# EAGLE board Magic CAN Node (EAGLE 5.12)
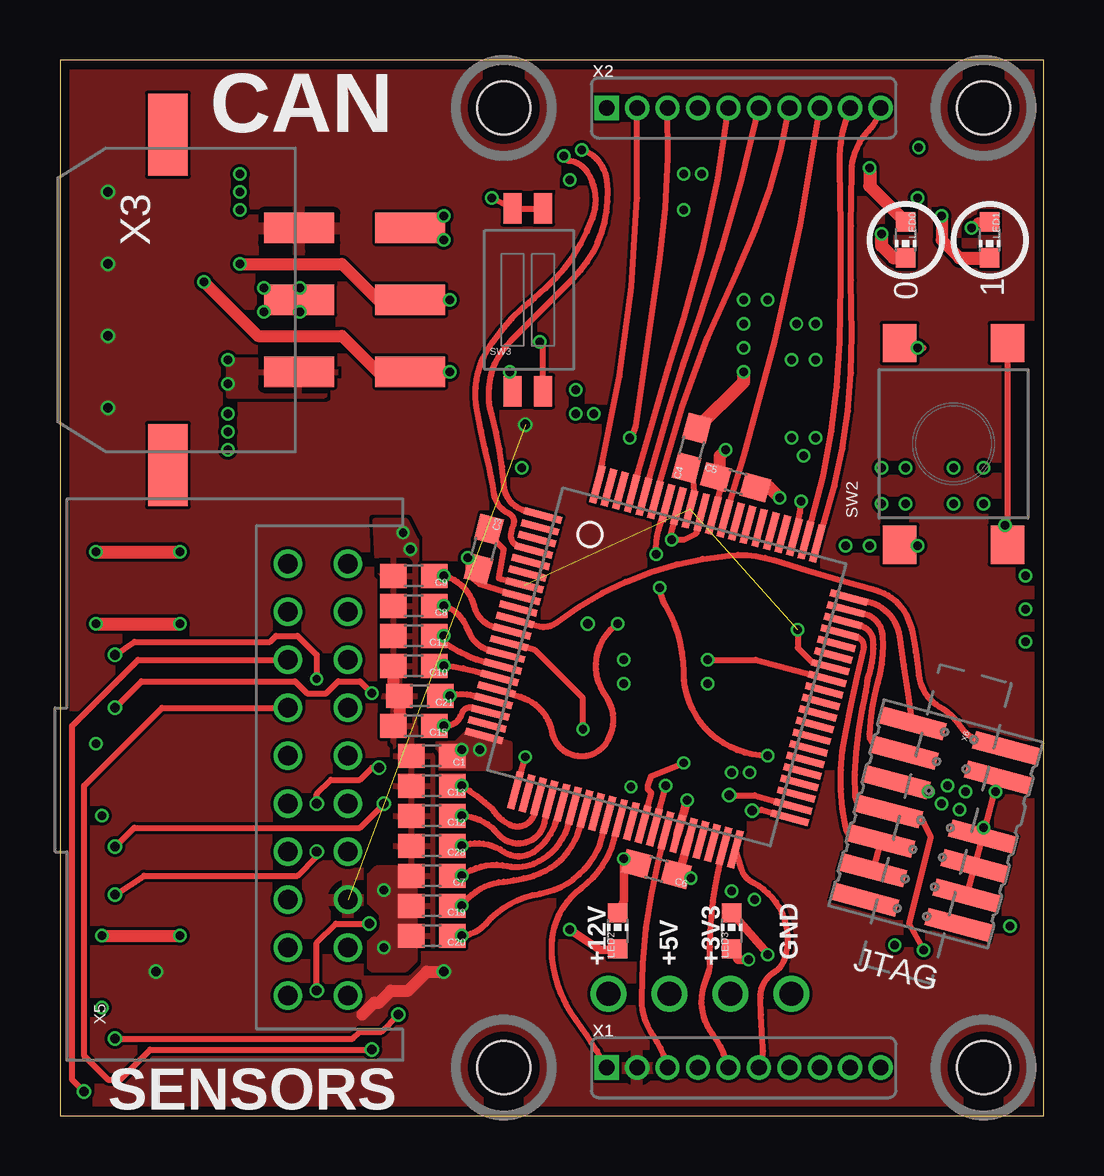
[diagram p0: board, top side]
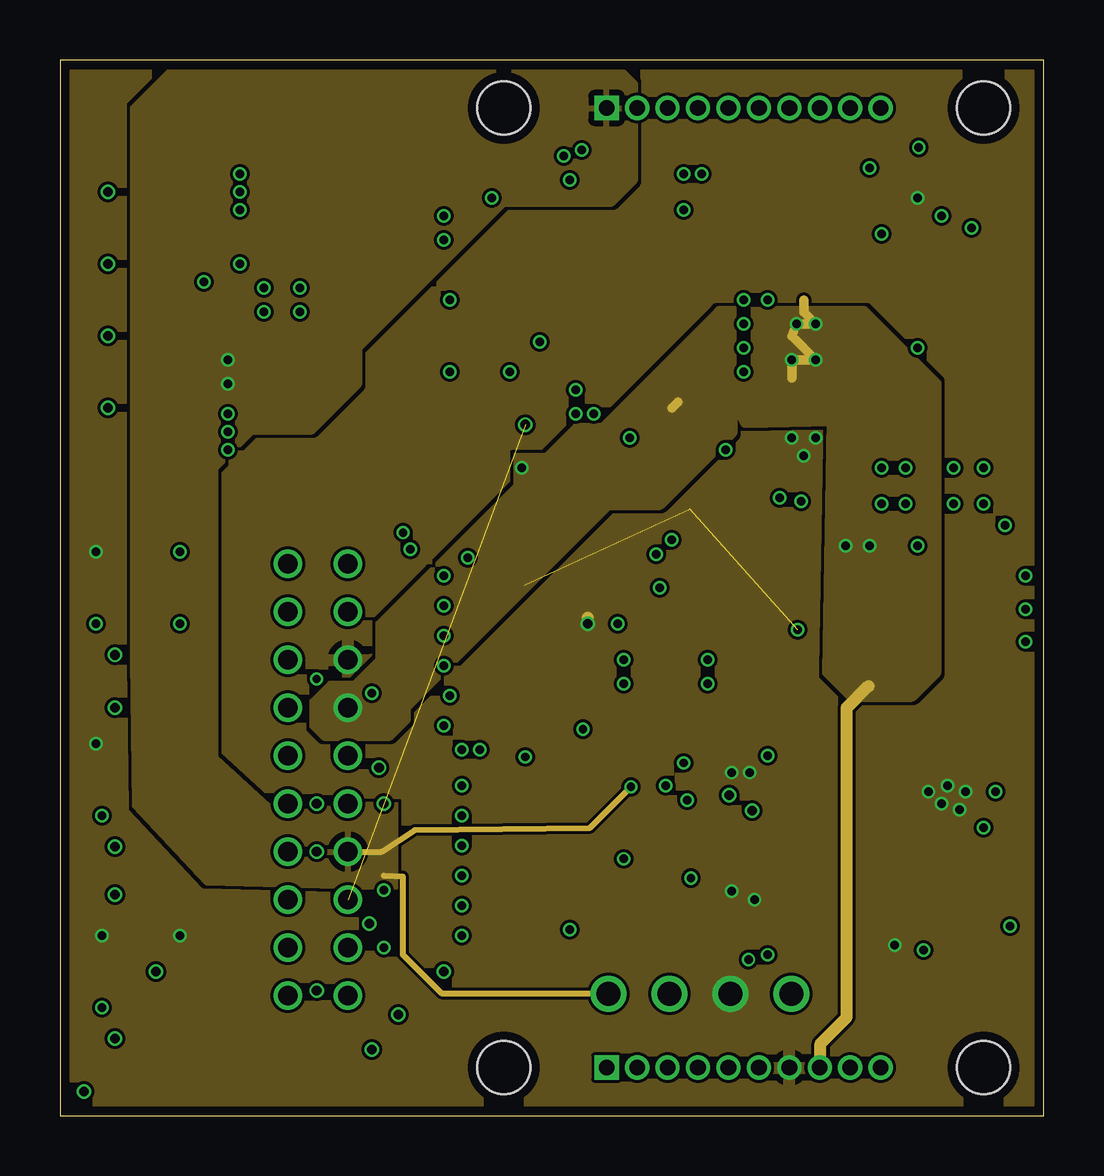
[diagram p1: board, inner layer Route2]
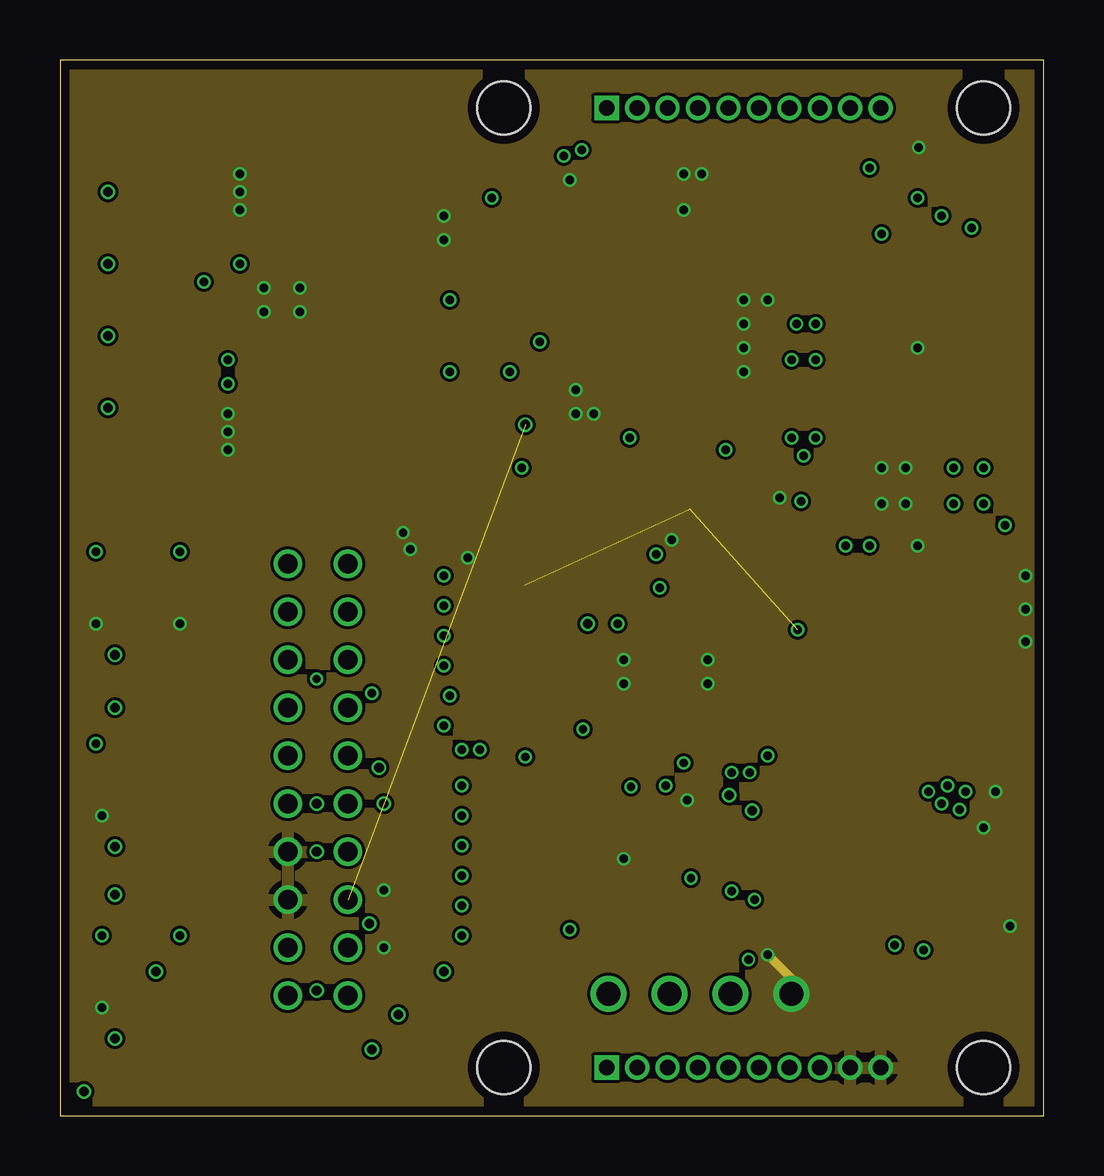
[diagram p2: board, inner layer Route15]
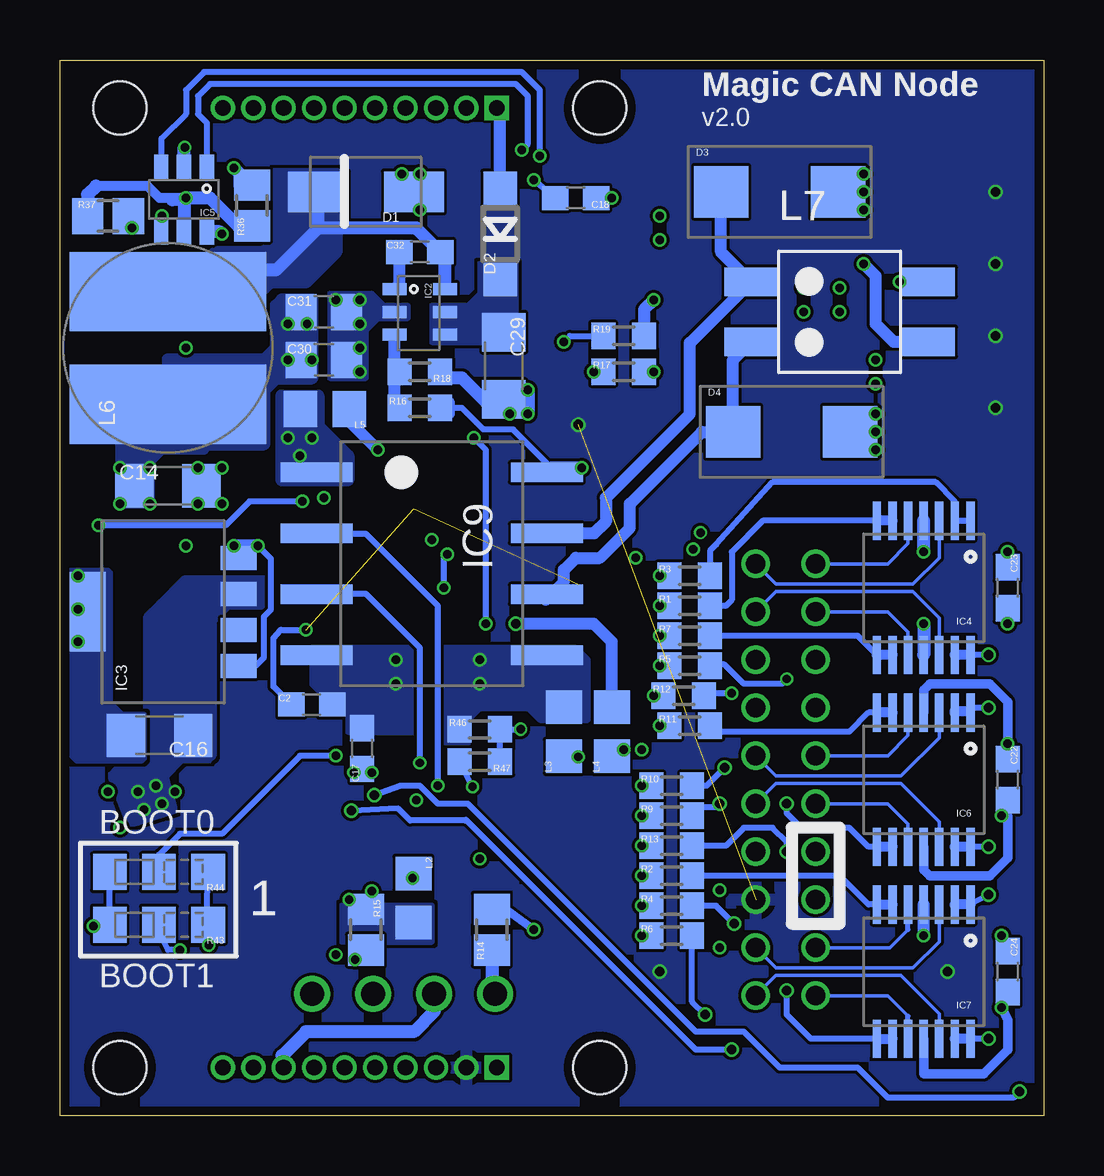
[diagram p3: board, bottom side, seen from below]

Size 41 x 44 mm. Coordinates in mm from the lower left corner, seen from the top.
Outline: 0,0 41,0 41,44 0,44 0,0
Copper layers (1+2*15+16): Top 0.0356mm / dielectric 0.1702mm / Route2 0.0178mm / dielectric 1.1938mm / Route15 0.0178mm / dielectric 0.1981mm / Bottom 0.0356mm
Design rules "OSH Park 4-layer (draft) 5-5": minimum track width 5mil, minimum drill 10mil, track to track 5mil, track to pad 5mil, pad to pad 5mil, via to via 5mil, smd to smd 5mil, copper to edge 15mil, drill to drill 8mil, minimum pad ring 4mil, minimum via ring 4mil, stop-mask expansion 4mil, vias tented up to drill 20mil, thermal gap 10mil
Holes 2.2 mm at 18.5,42 18.5,2 38.5,2 38.5,42

## Footprints (pad centres in the part's own frame; a part is rotated, then mirrored left to right if it is on the bottom)
C0603 = smd 1.1 x 1: 1 -0.85,0; 2 0.85,0
C1206 = smd 1.6 x 1.8: 1 -1.4,0; 2 1.4,0
C0805 = smd 1.3 x 1.5: 1 -0.95,0; 2 0.95,0
SMA = smd 2.5 x 1.7: ANODE -2,0; CATHODE 2,0
SOD123 = smd 1.4 x 1.4: A 1.9,0; C -1.9,0
DO-214AA = smd 2.261 x 2.159: 1 -2.438,0; 2 2.438,0
PQFP-80_(S-PQFP-G80) = smd 0.3 x 1.6: 1 -4.75,-6.6; 2 -4.25,-6.6; 3 -3.75,-6.6; 4 -3.25,-6.6; 5 -2.75,-6.6; 6 -2.25,-6.6; 7 -1.75,-6.6; 8 -1.25,-6.6; 9 -0.75,-6.6; 10 -0.25,-6.6; 11 0.25,-6.6; 12 0.75,-6.6; 13 1.25,-6.6; 14 1.75,-6.6; 15 2.25,-6.6; 16 2.75,-6.6; 17 3.25,-6.6; 18 3.75,-6.6; 19 4.25,-6.6; 20 4.75,-6.6; 41 4.75,6.6; 42 4.25,6.6; 43 3.75,6.6; 44 3.25,6.6; 45 2.75,6.6; 46 2.25,6.6; 47 1.75,6.6; 48 1.25,6.6; 49 0.75,6.6; 50 0.25,6.6; 51 -0.25,6.6; 52 -0.75,6.6; 53 -1.25,6.6; 54 -1.75,6.6; 55 -2.25,6.6; 56 -2.75,6.6; 57 -3.25,6.6; 58 -3.75,6.6; 59 -4.25,6.6; 60 -4.75,6.6 | smd 1.6 x 0.3: 21 6.6,-4.75; 22 6.6,-4.25; 23 6.6,-3.75; 24 6.6,-3.25; 25 6.6,-2.75; 26 6.6,-2.25; 27 6.6,-1.75; 28 6.6,-1.25; 29 6.6,-0.75; 30 6.6,-0.25; 31 6.6,0.25; 32 6.6,0.75; 33 6.6,1.25; 34 6.6,1.75; 35 6.6,2.25; 36 6.6,2.75; 37 6.6,3.25; 38 6.6,3.75; 39 6.6,4.25; 40 6.6,4.75; 61 -6.6,4.75; 62 -6.6,4.25; 63 -6.6,3.75; 64 -6.6,3.25; 65 -6.6,2.75; 66 -6.6,2.25; 67 -6.6,1.75; 68 -6.6,1.25; 69 -6.6,0.75; 70 -6.6,0.25; 71 -6.6,-0.25; 72 -6.6,-0.75; 73 -6.6,-1.25; 74 -6.6,-1.75; 75 -6.6,-2.25; 76 -6.6,-2.75; 77 -6.6,-3.25; 78 -6.6,-3.75; 79 -6.6,-4.25; 80 -6.6,-4.75
SOT-6_DDC = smd 0.5 x 1: 1 -0.95,-1.05; 2 0,-1.05; 3 0.95,-1.05; 4 0.95,1.05; 5 0,1.05; 6 -0.95,1.05
SOT-223-5 = smd 1 x 1.5: 1 -2.25,-3.15; 2 -0.75,-3.15; 3 0.75,-3.15; 4 2.25,-3.15 | smd 3.3 x 1.5: 5 0,3.15
PW_(R-PDSO-G14)_(TSSOP-14) = smd 0.35 x 1.6: 1 -1.95,-2.8; 2 -1.3,-2.8; 3 -0.65,-2.8; 4 0,-2.8; 5 0.65,-2.8; 6 1.3,-2.8; 7 1.95,-2.8; 8 1.95,2.8; 9 1.3,2.8; 10 0.65,2.8; 11 0,2.8; 12 -0.65,2.8; 13 -1.3,2.8; 14 -1.95,2.8
DBV_(R-PDSO-G6) = smd 0.6 x 1.05: 1 -0.95,-1.35; 2 0,-1.35; 3 0.95,-1.35; 4 0.95,1.35; 5 0,1.35; 6 -0.95,1.35
DUB_(R-PDSO-G8) = smd 0.8 x 3: 1 -3.81,-4.8; 2 -1.27,-4.8; 3 1.27,-4.8; 4 3.81,-4.8; 5 3.81,4.8; 6 1.27,4.8; 7 -1.27,4.8; 8 -3.81,4.8
0603 = smd 1.4 x 1.5: A 1.025,0; B -1.025,0
VLP8040 = smd 3.3 x 8.2: 1 2.35,0; 2 -2.35,0
SMD = smd 2.21 x 1.2: 1 -3.7,1.25; 2 -3.7,-1.25; 3 3.7,-1.25; 4 3.7,1.25
CHIP-LED0603 = smd 0.8 x 0.8: A 0,-0.75; C 0,0.75
R0603 = smd 1 x 1.1: 1 -0.85,0; 2 0.85,0
R0805 = smd 1.3 x 1.5: 1 -0.85,0; 2 0.85,0
0603-JUMPER-3WAY = smd 1.4 x 1.5: A 1.025,0; B -1.025,0; C 3.075,0
MC32884 = smd 1.6 x 1.4: A@1 -4.2,2.25; A@2 4.2,2.25; B@1 -4.2,-2.25; B@2 4.2,-2.25
218-2_GULLWING = smd 0.76 x 1.27: 1A -0.635,-3.81; 1B -0.635,3.81; 2A 0.635,-3.81; 2B 0.635,3.81
MA0.05"-1X10 = drill 0.65 pad 1.016 square: 1 -5.715,0 | drill 0.65 pad 1.016 round: 2 -4.445,0; 3 -3.175,0; 4 -1.905,0; 5 -0.635,0; 6 0.635,0; 7 1.905,0; 8 3.175,0; 9 4.445,0; 10 5.715,0
MICROFIT-6-DUAL-RA-SMD = smd 1.27 x 2.921: 1 3,5.47; 2 0,5.47; 3 -3,5.47; 4 3,10.1; 5 0,10.1; 6 -3,10.1 | smd 3.429 x 1.651: P$9 6.883,0; P$10 -6.883,0
MICROCLASP-20-DUAL-RA = drill 0.8 round: 1 -9,0; 2 -7,0; 3 -5,0; 4 -3,0; 5 -1,0; 6 1,0; 7 3,0; 8 5,0; 9 7,0; 10 9,0; 11 -9,-2.5; 12 -7,-2.5; 13 -5,-2.5; 14 -3,-2.5; 15 -1,-2.5; 16 1,-2.5; 17 3,-2.5; 18 5,-2.5; 19 7,-2.5; 20 9,-2.5
TI_JTAG_HEADER_0.05"_SMT = smd 0.737 x 2.794: 1 -3.81,-2.032; 2 -3.81,2.032; 3 -2.54,-2.032; 4 -2.54,2.032; 5 -1.27,-2.032; 7 0,-2.032; 8 0,2.032; 9 1.27,-2.032; 10 1.27,2.032; 11 2.54,-2.032; 12 2.54,2.032; 13 3.81,-2.032; 14 3.81,2.032

## Placement (x,y rotation side)
C1  2.2 uF  [C0603]  15.5,15 180 top
C2  2.2 uF  [C0603]  30.5,17.13 0 bottom
C3  2.2 uF  [C0603]  17.66,23.62 255 top
C4  2.2 uF  [C0603]  26.34,27.82 75 top
C5  2.2 uF  [C0603]  28.16,26.4 345 top
C6  2.2 uF  [C0603]  24.86,10.28 165 top
C7  33 nF  [C0603]  15.5,10 180 top
C8  33 nF  [C0603]  14.75,21.25 180 top
C9  33 nF  [C0603]  14.75,22.5 180 top
C10  33 nF  [C0603]  14.75,18.75 180 top
C11  33 nF  [C0603]  14.75,20 180 top
C12  33 nF  [C0603]  15.5,12.5 180 top
C13  33 nF  [C0603]  15.5,13.75 180 top
C14  1 uF 25V  [C1206]  36.5,26.25 0 bottom
C15  33 nF  [C0603]  14.75,16.25 180 top
C16  1 uF 25V  [C1206]  36.85,15.85 180 bottom
C17  2.2 uF  [C0603]  28.4,15.3 90 bottom
C18  4.7 nF  [C0603]  19.5,38.25 180 bottom
C19  33 nF  [C0603]  15.5,8.75 180 top
C20  33 nF  [C0603]  15.5,7.5 180 top
C21  33 nF  [C0603]  15,17.5 180 top
C22  0.1u  [C0603]  1.5,14 270 bottom
C23  0.1u  [C0603]  1.5,22 270 bottom
C24  0.1u  [C0603]  1.5,6 270 bottom
C28  33 nF  [C0603]  15.5,11.25 180 top
C29  1 uF 25V  [C1206]  22.5,31.25 270 bottom
C30  22 uF  [C0805]  30,31.5 0 bottom
C31  22 uF  [C0805]  30,33.5 0 bottom
C32  0.1 uF  [C0603]  26,36 0 bottom
D1  [SMA]  28.25,38.5 180 bottom
D2  [SOD123]  22.65,36.75 90 bottom
D3  SMBJ30CA  [DO-214AA]  11,38.5 0 bottom
D4  SMBJ30CA  [DO-214AA]  10.5,28.5 0 bottom
IC1  TMS320F28034PNT  [PQFP-80_(S-PQFP-G80)]  25.28,18.71 255 top
IC2  LMR14206  [SOT-6_DDC]  26,33.5 270 bottom
IC3  LP38693-3.3/NOPBMP  [SOT-223-5]  36.7,21 90 bottom
IC4  [PW_(R-PDSO-G14)_(TSSOP-14)]  5,22 180 bottom
IC5  SN74LVCG207DBV  [DBV_(R-PDSO-G6)]  35.83,38.19 180 bottom
IC6  [PW_(R-PDSO-G14)_(TSSOP-14)]  5,14 180 bottom
IC7  [PW_(R-PDSO-G14)_(TSSOP-14)]  5,6 180 bottom
IC9  ISO1050  [DUB_(R-PDSO-G8)]  25.5,23 270 bottom
L2  [0603]  26.26,9.07 270 bottom
L3  [0603]  20,16 90 bottom
L4  [0603]  18,16 90 bottom
L5  [0603]  29.96,29.44 180 bottom
L6  18 uH  [VLP8040]  36.5,32 90 bottom
L7  DR331-513AE  [SMD]  8.5,33.5 0 bottom
LED0  Green  [CHIP-LED0603]  35.25,36.5 180 top
LED1  Yellow  [CHIP-LED0603]  38.75,36.5 180 top
LED2  +12V OK  [CHIP-LED0603]  23.25,7.7 0 top
LED3  +3V3 OK  [CHIP-LED0603]  28,7.7 0 top
R1  1k  [R0603]  14.75,21.25 0 bottom
R2  1k  [R0603]  15.5,10 0 bottom
R3  1k  [R0603]  14.75,22.5 0 bottom
R4  1k  [R0603]  15.5,8.75 0 bottom
R5  1k  [R0603]  14.75,18.75 0 bottom
R6  1k  [R0603]  15.5,7.5 0 bottom
R7  1k  [R0603]  14.75,20 0 bottom
R9  1k  [R0603]  15.5,12.5 0 bottom
R10  1k  [R0603]  15.5,13.75 0 bottom
R11  1k  [R0603]  14.75,16.25 0 bottom
R12  1k  [R0603]  15,17.5 0 bottom
R13  1k  [R0603]  15.5,11.25 0 bottom
R14  82  [R0805]  23,7.75 90 bottom
R15  82  [R0805]  28.25,7.75 270 bottom
R16  5.6k 1%  [R0603]  26,29.5 0 bottom
R17  60  [R0603]  17.5,31 0 bottom
R18  1k 1%  [R0603]  26,31 180 bottom
R19  60  [R0603]  17.5,32.5 0 bottom
R36  82  [R0805]  32.99,37.93 90 bottom
R37  82  [R0805]  39,37.5 0 bottom
R43  BOOT1  [0603-JUMPER-3WAY]  35.85,7.95 180 bottom
R44  BOOT0  [0603-JUMPER-3WAY]  35.85,10.15 180 bottom
R46  10k  [R0603]  23.5,16.1 0 bottom
R47  36k  [R0603]  23.5,14.75 180 bottom
SW2  IN1  [MC32884]  37.25,28 90 top
SW3  [218-2_GULLWING]  19.5,34 0 top
U$1  CURRENT-C-LETTER-LANDSCAPE  [BLANK]  0,0 0 top
U$2  CURRENT-C-LETTER-LANDSCAPE  [BLANK]  0.5,0.5 0 top
U$3  CURRENT-C-LETTER-LANDSCAPE  [BLANK]  42.31,41 135 top
U$6  CURRENT-C-LETTER-LANDSCAPE  [BLANK]  36.59,37.17 180 top
U$7  CURRENT-C-LETTER-LANDSCAPE  [BLANK]  0.03,-0.04 270 top
U$8  CURRENT-C-LETTER-LANDSCAPE  [BLANK]  0,0 0 top
U$9  CURRENT-C-LETTER-LANDSCAPE  [BLANK]  0,0 90 bottom
U$11  CURRENT-LOGO-0.5"  [CURRENT-0.5"]  -16.15,6.6 0 bottom  (outside the outline)
X1  [MA0.05"-1X10]  28.5,2 0 top
X2  [MA0.05"-1X10]  28.5,42 0 top
X3  [MICROFIT-6-DUAL-RA-SMD]  4.5,34 270 top
X5  SENSORS  [MICROCLASP-20-DUAL-RA]  9.5,14 90 top
X6  JTAG_HEADER  [TI_JTAG_HEADER_0.05"_SMT]  36.5,12.15 255 top

## Library data of the parts
C1-C6 C17 = rcl; PARTNO: GRM188R61E225KA12D
C7-C13 C15 C18-C21 C28 R17 R19 = rcl
C14 C16 C29 = rcl; PARTNO: GRM32RR71H105KA01L
C22-C24 C32 = rcl; PARTNO: C1608X7R1E104K080AA
C30 C31 = rcl; PARTNO: GRM21BR60J226ME39L
D1 = Diodes; PARTNO: B130-13-F
D2 = diode; PARTNO: STPS0560Z
D3 D4 = Littelfuse; PARTNO: SMBJ30CALFCT-ND
IC1 = TI; PARTNO: TMS320F28035PNT
IC2 = TI; PARTNO: LMR14206XMKE/NOPB
IC3 = TI; PARTNO: LP38693MP-3.3/NOPB
IC4 IC6 IC7 = TI; PARTNO: TLV2764IPWR
IC5 = TI; PARTNO: SN74LVC2G07DBVR
IC9 = TI; PARTNO: ISO1050DUBR
L2-L5 = Passives; PARTNO: BKP1608HS600-T
L6 = TDK; PARTNO: SDR0604-180YL
L7 = Bourns; PARTNO: DR331-513AECT-ND
LED0 LED2 LED3 = led; PARTNO: LGQ971
LED1 = led; PARTNO: SML-LX0603YW-TR
R1-R7 R9-R13 = rcl; PARTNO: MC0603WGF1001T5E-TC
R14 R15 R36 R37 = resistor; PARTNO: ERJ-6GEYJ820V
R16 = rcl; PARTNO: RR0510P-3321-D
R18 = rcl; PARTNO: CRCW04021K00JNTD
R43 R44 = Passives; PARTNO: RC0603FR-0720KL
R46 = rcl; PARTNO: ERJ-2RKF1002X
R47 = rcl; PARTNO: ERJ-2RKF3602X
SW2 = Multicomp; PARTNO: FSM1LPATR
SW3 = CTS; PARTNO: 218-2LPST
U$1-U$3 U$6-U$9 = Frames; BOM: EXCLUDE
U$11 = Logos; BOM: EXCLUDE
X1 X2 = Pin headers; PARTNO: BD020-10-A-J-0350-0300-L-G
X3 = Molex; PARTNO: 43045-0609
X5 = Molex-Aaron; PARTNO: 55959-2030
X6 = TI; PARTNO: FTS-107-01-F-DV

## Nets
!TRST: IC1.10 X6.2
!XRS: IC1.9
+3V3: C16.1 C17.1 C22.1 C23.1 C24.1 IC3.3 IC4.4 IC5.5 IC6.4 IC7.4 IC9.1 L2.A L4.A L5.A R15.1 R36.1 R37.1 R43.B R44.B X1.7 X5.18 X6.5
+5V: C14.1 C30.1 C31.1 IC3.1 IC3.4 IC9.8 L6.2 R16.2 X1.8 X5.17
+12V: D2.A R14.1 R47.2 X2.1 X3.1 X5.14
ADCINA0: C15.1 IC1.18 R11.1
ADCINA1: C21.1 IC1.17 R12.1
ADCINA2: IC1.16 X2.3
ADCINA3: C10.1 IC1.15 R5.1
ADCINA4: C11.1 IC1.14 R7.1
ADCINA5: C8.1 IC1.13 R1.1
ADCINA7: C9.1 IC1.11 R3.1
ADCINB0: C13.1 IC1.23 R10.1
ADCINB1: C12.1 IC1.24 R9.1
ADCINB2: C28.1 IC1.25 R13.1
ADCINB3: C7.1 IC1.26 R2.1
ADCINB4: C19.1 IC1.27 R4.1
ADCINB6: C20.1 IC1.29 R6.1
ADCINB7: IC1.30 X1.1
AIN-1: IC4.3 X5.20
AIN-2: IC4.12 X5.19
AIN-3: IC6.3 X5.16
AIN-4: IC6.12 X5.15
AIN-5: IC7.3 X5.12
AIN-6: IC7.12 X5.11
AIN-7: IC7.10 X5.1
AIN-8: IC7.5 X5.2
AIN-9: IC6.10 X5.5
AIN-10: IC6.5 X5.6
AIN-11: IC4.10 X5.9
AIN-12: IC4.5 X5.10
CAN-RX: IC1.33 IC9.2
CAN-TX: IC1.32 IC9.3
CANH: L7.4 R17.2 X3.4
CANL: L7.3 R19.2 X3.5
GND: C1.2 C2.2 C3.2 C4.2 C5.2 C6.2 C7.2 C8.2 C9.2 C10.2 C11.2 C12.2 C13.2 C14.2 C15.2 C16.2 C17.2 C18.2 C19.2 C20.2 C21.2 C22.2 C23.2 C24.2 C28.2 C29.2 C30.2 C31.2 D1.ANODE D3.2 D4.2 IC1.8 IC1.35 IC1.53 IC1.71 IC1.73 IC2.2 IC3.5 IC4.11 IC5.2 IC6.11 IC7.11 IC9.4 IC9.5 L3.A LED2.C LED3.C R18.1 R43.C R44.C R46.1 SW2.A@1 SW2.A@2 X1.9 X1.10 X3.2 X3.6 X5.3 X5.4 X6.4 X6.8 X6.10 X6.12
GP0: IC1.41 X5.7
GP1: IC1.42 X5.8
GP_BUTTON: IC1.63 SW2.B@1 SW2.B@2
GPIO0: IC1.69 X2.8
GPIO5: IC1.62 X2.9
GPIO9: IC1.39 X1.5
GPIO11: IC1.61 X2.10
GPIO34: IC1.74 R44.A
LED0: IC1.1 IC5.1
LED1: IC1.4 IC5.3
N$1: LED2.A R14.2
N$2: LED3.A R15.2
N$3: C32.2 D1.CATHODE IC2.6 L6.1
N$4: IC4.6 IC4.7 R1.2
N$5: IC4.8 IC4.9 R7.2
N$6: IC6.13 IC6.14 R9.2
N$7: C32.1 IC2.1
N$8: C29.1 D2.C IC2.4 IC2.5
N$9: IC6.1 IC6.2 R12.2
N$10: IC1.21 L3.B
N$11: C6.1 IC1.36 L2.B
N$12: C5.1 IC1.70 L5.B
N$13: IC4.1 IC4.2 R3.2
N$14: IC4.13 IC4.14 R5.2
N$15: IC7.1 IC7.2 R13.2
N$16: IC7.6 IC7.7 R2.2
N$17: IC6.8 IC6.9 R10.2
N$18: IC6.6 IC6.7 R11.2
N$19: IC7.8 IC7.9 R4.2
N$20: D4.1 IC9.6 L7.2
N$21: D3.1 IC9.7 L7.1
N$22: R19.1 SW3.2A
N$23: R17.1 SW3.1A
N$24: C18.1 SW3.1B SW3.2B
N$25: IC7.13 IC7.14 R6.2
N$27: X1.4
N$37: IC5.6 LED0.C
N$38: IC5.4 LED1.C
N$39: LED0.A R36.2
N$40: LED1.A R37.2
N$42: X2.4
PWROUT_INT: IC1.12 R46.2 R47.1
SERIAL_RX/I2C_SDA: IC1.40 X1.6
SERIAL_TX/I2C_SCL: IC1.34 X1.3
SHIELD: X1.2 X3.3 X5.13
SPI_CLK: IC1.77 X2.5
SPI_CS: IC1.75 X2.7
SPI_SIMO: IC1.80 X2.2
SPI_SOMI: IC1.76 X2.6
TCK: IC1.57 X6.9 X6.11
TDI: IC1.59 X6.3
TDO: IC1.58 R43.A X6.7
TMS: IC1.60 X6.1
VDD: C2.1 C3.1 C4.1 IC1.7 IC1.54 IC1.72
VDDA: C1.1 IC1.20 L4.B
VSENSE1: IC2.3 R16.1 R18.2

## Tracks (layer width: path | path; a pad name or v marks a point on that pad's centre or on a via)
!TRST
  Top 0.25: IC1.10 19.95,20.4 arc52 20.7,20.55 arc-32 27.9,23.35 arc-23 29.75,23.15 arc2 34,21.9 arc-53 35.35,20.7 arc-13 35.6,19.8 arc-2 35.8,18.35 arc53 36.65,17.05 arc-26 37.55,16.2 arc44 38.35,15.65 arc-10 X6.2
+3V3  (via drill 0.35, 0.4, 1)
  Top 0.25: X6.5 v36.2,13.5
  Top 0.5: v1.75,7.5 v5,7.5
  Top 0.55: v1.5,23.5 v5,23.5
  Route2 0.5: v22,20.5 22,20.75
  Bottom 0.25: R44.B 34.9,7.8 34.89,7.7 | v34.8,7.1 34.89,7.7 | 34.89,7.7 R43.B | C17.1 v28,14.3
  Bottom 0.4: IC6.4 5,17.75 4.75,18 2.25,18 1.5,17.25 v1.5,15.5 C22.1
  Bottom 0.406: C23.1 v1.5,23.5 | 39.5,38.75 37.35,38.75 36.85,38.25 36.4,38.25 36.32,38.17
  Bottom 0.5: v5,7.5 IC7.4 | C24.1 v1.75,7.5 | L4.A 18,19.75 18.75,20.5 v22,20.5
  Bottom 0.55: 35.83,38.17 IC5.5 | 35.83,38.17 v35.75,38.25 34.75,38.25 33.58,37.08 R36.1 | R37.1 39.85,38.4 39.5,38.75 | 35.83,38.17 36.32,38.17 | v5,23.5 IC4.4
  other vias: 37,13.75 37.75,13.5 37.5,12.75 36.75,13 28.75,14.3 28,9.35 28.95,9 27.94,5.08 30.5,28.25 31.5,28.25 31,27.5
  pour Route2 (rank 4): 0.5,43.5 40.5,43.5 40.5,0.5 0.5,0.5
  pour Bottom (no thermals): 25.5,8.75 29.25,8.75 29.25,7.25 25.5,7.25
  pour Bottom (no thermals): 30.25,30 30.25,28.75 29,27.5 29,26.5 31.75,26.5 31.75,30
  pour Bottom (rank 2, no thermals): 32.6,21.2 34,21.2 34.6,20.6 34.6,15 34.8,14.8 35.9,14.8 36.6,14.1 36.2,12.7 38.1,12.1 38.9,14.2 37.4,15.8 37.4,20.8 35.8,22.4 32.5,22.4 32.5,21.3
+5V  (via drill 0.35, 1)
  Route2 0.4: 25.5,29.5 25.75,29.75 | v30.5,31.5 31,31.5 | v30.5,31.5 30.5,30.75 | v30.5,31.5 v31.5,31.5 30.5,32.5 v30.7,33 v31.5,33 31,33.5 31,34
  Route2 0.5: 33.7,17.9 32.8,17 32.8,4.1 31.7,3 31.7,2 X1.8
  Bottom 0.25: 25.25,29.5 24.25,29.5 23.35,28.6 22.11,28.6 20.51,27 | IC3.1 32.85,18.75 32.5,19.1 32.5,20.8 32.2,21.1 32.2,23.2 v32.75,23.75
  Bottom 0.4: R16.2 24.9,29.25 24.75,29.25 | 24.75,29.25 24.75,29.75 25,29.75 25.25,29.5 25,29.5 24.75,29.25 | 31,34 30.75,33.75 30.75,33.5 31.25,34 31,34
  Bottom 0.5: 30.75,3.5 30.75,3.45 31.7,2.5
  Bottom 0.55: C31.1 30.95,33.45 v30.7,33 | IC9.8 20.51,27 v19.25,27 | v25.4,5.08 25.4,4.35 26.25,3.5 30.75,3.5 31.75,2.5 31.75,2.08 X1.8 | 33.75,23.65 IC3.4 32.85,23.75 v32.75,23.75 v33.75,23.75 33.75,23.65
  other vias: 37.25,27 37.25,25.5 38.5,25.5 38.5,27
  pour Route2 (rank 3): 22.5,28.5 22,28.5 21.5,28 21.5,26 22,25.5 25,25.5 28,28.5 28,30 28.6,28.9 32.2,29 32,18.5 33,17.5 35.5,17.5 36.5,18.5 36.5,30.5 33.5,33.5 27.5,33.5
  pour Route2 (no thermals): 24,28.75 21.5,28.75 20.25,27.5 19,27.5 19,26.25 13.25,20.5 13.25,19 12.25,18 11.25,18 10.5,17.25 10.5,16.25 11,15.75 13.75,15.75 14.5,16.5 14.5,17 24.25,26.75 24.25,28.5
  pour Bottom (no thermals): 36.5,31.25 36.5,28 32.5,28 32.5,30.25 32,30.75 30.5,30.75 30.5,34 31.75,34 32,33.75 32,32 32.5,31.5 36.5,31.5
  pour Bottom (no thermals): 35.25,27.75 36.75,27.75 37.25,27.25 37.25,25.5 38.5,25.5 38.5,29 35,29 35,27.75
+12V  (via drill 0.35, 1)
  Route2 0.25: v23.8,13.7 22.1,12 14.8,11.9 13.4,11 X5.14 | 13.5,10 14.3,9.95 14.3,6.7 15.9,5.1 22.84,5.1 v22.86,5.08
  Bottom 0.25: v23.8,13.7 R47.2 | R14.1 23,5.3 22.8,5.1 22.84,5.1 v22.86,5.08
  Bottom 0.5: D2.A 22.65,41.87 X2.1
  Bottom 0.55: R14.1 23,5.22
  other vias: 7,31.5 7,30.5
  pour Route2 (rank 2): 4.5,43.5 3,42 3,19 3.1,12.9 6.1,9.7 14,9.5 14,13 8.7,12.9 6.5,14.9 6.5,27 8,28.5 10.5,28.5 12.5,30.5 12.5,32 18.5,38 23,38 24,39 24,43 23.5,43.5
  pour Top: 11.5,31.5 7,31.5 7,30 11,30 11.5,30.5
ADCINA0  (via drill 0.35)
  Top 0.25: IC1.18 17.25,17 arc34 17,17 arc56 16.75,16.75 arc-79 v16,16.25
  Top 0.5: C15.1 v16,16.25
  Bottom 0.5: v16,16.25 C15.1
ADCINA1  (via drill 0.35)
  Top 0.25: 15.75,17.5 15.65,17.65 | IC1.17 17.25,17.5 arc31 v16.25,17.5
  Top 0.5: v16.25,17.5 C21.1 15.75,17.5
  Bottom 0.5: v16.25,17.5 C21.1
ADCINA2  (via drill 0.35)
  Top 0.25: IC1.16 19.2,17.45 arc-62 20.5,16 arc133 22.75,15.5 arc72 22.75,17.5 arc-91 v23.25,20.5 | v23.75,28.25 arc37 24,28.75 25,35.75 arc10 X2.3
  Bottom 0.25: v23.25,20.5 23.25,27.75 v23.75,28.25
ADCINA3  (via drill 0.35)
  Top 0.25: C10.1 15.75,18.75 | IC1.15 17.2,18.55 arc12 v16,18.75
  Top 0.5: 15.75,18.75 v16,18.75
  Bottom 0.5: v16,18.75 C10.1
ADCINA4  (via drill 0.35)
  Top 0.25: C11.1 15.85,20 | IC1.14 17.75,18.9 arc-24 16,19.75 arc-104 v16,20
  Top 0.5: C11.1 v16,20
  Bottom 0.5: 15.75,20 v16,20 C11.1
ADCINA5  (via drill 0.35)
  Top 0.25: IC1.13 17.9,19.4 arc-55 17,20.25 arc52 v16,21.25
  Top 0.5: v16,21.25 C8.1
  Bottom 0.5: v16,21.25 C8.1
ADCINA7  (via drill 0.35)
  Top 0.25: IC1.11 18.15,20.35 arc-61 17.25,21.25 arc61 v16,22.5
  Top 0.5: C9.1 v16,22.5
  Bottom 0.5: v16,22.5 C9.1
ADCINB0  (via drill 0.35)
  Top 0.25: IC1.23 19.75,12.5 arc-98 18.7,12.15 arc-29 18,12.8 arc12 v16.75,13.75
  Top 0.5: C13.1 v16.75,13.75
  Bottom 0.5: v16.75,13.75 C13.1
ADCINB1  (via drill 0.35)
  Top 0.25: IC1.24 20.2,12.2 arc-127 18.25,11.75 arc47 v16.75,12.5
  Top 0.5: C12.1 v16.75,12.5
  Bottom 0.5: v16.75,12.5 C12.1
ADCINB2  (via drill 0.35)
  Top 0.25: C28.1 16.25,11 | IC1.25 20.7,12.3 arc-39 19.75,11 arc-68 18.5,11 arc52 v16.75,11.25
  Top 0.5: C28.1 v16.75,11.25
  Bottom 0.5: v16.75,11.25 C28.1
ADCINB3  (via drill 0.35)
  Top 0.25: IC1.26 21.2,12.15 arc-53 19.75,10.5 arc-34 18.65,10.4 arc48 v16.75,10
  Top 0.5: C7.1 v16.75,10
  Bottom 0.5: v16.75,10 C7.1
ADCINB4  (via drill 0.35)
  Top 0.25: IC1.27 21.65,11.95 arc-57 19.75,10 arc-12 18.5,9.75 arc49 v16.75,8.75
  Top 0.5: C19.1 v16.75,8.75
  Bottom 0.5: v16.75,8.75 C19.1
ADCINB6  (via drill 0.35)
  Top 0.25: IC1.29 22.6,11.6 arc-65 20,9.25 arc39 17.75,8 arc-44 v16.75,7.5
  Top 0.5: C20.1 v16.75,7.5
  Bottom 0.5: v16.75,7.5 C20.1
ADCINB7
  Top 0.25: IC1.30 23.1,11.5 arc-39 21.75,9.5 arc54 20.5,7 arc36 21.5,4 arc-8 X1.1
AIN-1
  Bottom 0.15: X5.20 11.15,22.15 5.45,22.15 4.35,23.25 IC4.3
AIN-2
  Bottom 0.15: X5.19 11.15,21.85 5.45,21.85 4.35,20.75 IC4.12
AIN-3
  Bottom 0.15: X5.16 11.15,14.15 5.95,14.15 4.35,15.75 IC6.3
AIN-4
  Bottom 0.15: X5.15 11.15,13.85 5.95,13.85 4.35,12.25 IC6.12
AIN-5
  Bottom 0.15: X5.12 11.15,6.15 5.45,6.15 4.35,7.25 IC7.3
AIN-6
  Bottom 0.15: X5.11 11.15,5.85 5.95,5.85 4.35,4.25 IC7.12
AIN-7
  Bottom 0.15: 5.65,4.15 6.5,5 X5.1
  Bottom 0.2: IC7.10 5.65,4.15
AIN-8
  Bottom 0.15: 5.65,7.75 6.4,7 X5.2
  Bottom 0.2: 5.65,7.75 IC7.5
AIN-9
  Bottom 0.15: IC6.10 5.65,12.15 6.5,13 X5.5
AIN-10
  Bottom 0.15: IC6.5 5.65,15.85 6.5,15 X5.6
AIN-11
  Bottom 0.15: IC4.10 5.65,20.15 6.5,21 X5.9
AIN-12
  Bottom 0.15: IC4.5 5.65,23.85 6.5,23 X5.10
CAN-RX  (via drill 0.35)
  Top 0.25: IC1.33 v25.25,13.75
  Bottom 0.25: v25.25,13.75 25.25,21.25 28.25,24.25 30.28,24.25 IC9.2
CAN-TX  (via drill 0.35)
  Top 0.25: IC1.32 24.65,13.45 24.5,13.6 24.5,13.75 24.65,14.15 v26,14.7
  Bottom 0.25: v26,14.7 26,19.5 28.25,21.75 30.28,21.75 IC9.3
CANH  (via drill 0.35)
  Top 0.5: v6,34.75 8.25,32.5 11.75,32.5 13.25,31 X3.4 v16.25,31
  Bottom 0.5: L7.4 v6,34.75 | v16.25,31 R17.2
CANL  (via drill 0.35)
  Top 0.5: v7.5,35.5 11.75,35.5 13.25,34 X3.5 v16.25,34
  Bottom 0.5: v7.5,35.5 7,35 7,33 6.25,32.25 L7.3 | v16.25,34 16.65,33.6 R19.2
GND  (via drill 0.35, 1)
  Top 0.25: X6.12 X6.10 X6.8 | X6.8 X6.4 | X6.8 v38.5,12 | IC1.73 25.45,24.15 v25.5,24 26,24 26.5,24.25 IC1.71 | IC1.53 29,19 v27,19 | X3.2 v10,34.5 | X3.6 v16,36.5 | IC1.8 17.5,22.15 arc-15 17.05,22.6 | C3.2 17.05,22.6 | 17.05,22.6 v17,23.25 | SW2.A@2 36,32 v35.75,32 | SW2.A@1 v35.75,23.75
  Top 0.35: IC1.35 v26.15,13.15 | C6.2 v23.5,10.7 23.5,8.95 LED2.C | LED3.C 29.5,6.75 v29.5,6.7
  Top 0.5: C10.2 13.9,17.75 C21.2 14.15,16.5 C15.2
  Top 0.55: C4.2 28.5,30.58 v28.5,31 | v1.5,20.5 v5,20.5 | C5.2 29.57,26.18 v30,25.75
  Route15 0.35: v26.15,13.15 26.2,13.2 | v29.5,6.7 30.48,5.72 v30.48,5.08
  Bottom 0.25: v7,28.5 D4.2 | v7.5,38.5 D3.2 | C18.2 v21.25,39 | C14.2 v35.25,25.5 | C30.2 v28.5,32 | C31.2 v29.5,34 | D1.ANODE v26,39.25 | R44.C R43.C v39.6,7.9
  Bottom 0.4: IC6.11 5,10.25 4.75,10 2.25,10 1.5,10.75 1.5,12.5 v1.75,12.5 C22.2 | v1.75,4.5 1.5,4 1.5,2.75 2.5,1.75 5,1.75 IC7.11
  Bottom 0.406: C23.2 v1.5,20.5
  Bottom 0.5: v1.75,4.5 C24.2
  Bottom 0.55: IC5.2 35.83,40.32 v35.8,40.35 | C29.2 22.25,29.6 v22.25,29.25 | C29.2 22.1,30.25 v21.5,30.25 v21.5,29.25 | R18.1 24.9,30.75 24.25,30.75 23.25,29.75 22.75,29.75 22.65,29.85 C29.2 | IC3.5 39.75,21.1 v40.25,21.1 | v5,20.5 IC4.11
  other vias: 39,13.5 27,18 23.5,19 23.5,18 7.5,39.25 7.5,37.75 7,29.25 7,27.75 8.5,34.5 8.5,33.5 10,33.5 16,37.5 34.25,27 35.25,27 34.25,25.5 28.5,34 28.5,33 26.75,39.25 26,37.75 40.25,22.5 40.25,19.75 13.5,7 13.5,9.4 14.3,24.3 14.6,23.6
  pour Route15: 0.5,43.5 40.5,43.5 40.5,0.5 0.5,0.5
  pour Bottom (no thermals): 19.5,19.5 30.5,19.5 30.5,18 29.75,17.25 29,16.75 29,16 25.5,16 25,15.5 24,15.5 24,16.5 23.5,17 21.5,17 21,16.5 19,16.5 19,19
  pour Top: 13.15,24.8 14.4,24.8 14.85,23.95 14.75,16.25 15.25,15.75 15.25,15.25 15.5,15 15.5,7 15.25,6.75 14.25,6.75 14,7 14,15.5 13.5,16 13.5,22.5 13.25,22.75
  pour Bottom (no thermals): 26.5,33.75 27.5,33.75 28,34.25 29.75,34.25 29.75,30.75 28.25,30.75 28.25,32.75 27.75,33.25 26.5,33.25
  pour Bottom (no thermals): 37.5,16.7 38.4,16.7 38.9,17.2 38.9,22.6 39,22.7 40.6,22.7 40.8,22.5 40.8,15.3 40.3,14.8 37.6,14.8 37.5,14.9
  pour Top (no thermals): 14.2,10.3 13.2,10.3 12.9,10 12.9,8.9 13.4,8.4 13.4,7.7 12.9,7.2 12.9,6.2 13,6.1 14.4,6.1 14.8,6.5 14.8,9.7
GP0  (via drill 0.4)
  Top 0.25: IC1.41 29.25,12.75 v28.85,12.7 | v13,2.75 3.75,2.75 2.5,1.5 2,1.5 1,2.5 1,13.75 4.25,17 X5.7
  Bottom 0.25: v13,2.75 14.5,2.75 24.07,12.32 24.1,12.3 26.4,12.3 26.9,12.8 v28.85,12.7
GP1  (via drill 0.4)
  Top 0.25: IC1.42 28.95,13.35 v27.9,13.35 | v1,1 0.5,1.5 0.5,16.25 3.25,19 X5.8
  Bottom 0.25: v27.9,13.35 26.8,13.75 26,13.75 25.25,13 24,13 14.5,3.5 12.5,3.5 11,2 7.75,2 6.5,0.75 1.25,0.75 v1,1
GP_BUTTON  (via drill 0.35)
  Top 0.25: IC1.63 30.8,24.9 arc10 v30.9,25.6 | v39.4,24.6 39.4,23.9 SW2.B@1 SW2.B@2
  Bottom 0.25: v30.9,25.6 33.1,25.6 34.1,24.6 v39.4,24.6
GPIO0
  Top 0.25: IC1.69 28.5,27.5 arc9 X2.8
GPIO5
  Top 0.25: IC1.62 31.35,24.85 arc15 32.5,32.25 arc3 32.5,39.5 arc-23 X2.9
GPIO9
  Top 0.25: IC1.39 27.45,10.2 arc8 27.15,8.25 arc6 27.1,6.45 arc-26 26.95,5.7 arc61 27.2,3.4 arc-23 X1.5
GPIO11
  Top 0.25: IC1.61 31.85,24.7 arc19 33,32.55 arc-2 33,39.35 arc-43 33.7,41.05 arc31 X2.10
GPIO34  (via drill 0.35)
  Top 0.25: v29.5,15 arc-90 26,18.5 arc31 25.25,21.25 arc-24 v25,22 | v24.85,23.4 24.85,23.65 arc-24 25.1,24.85 arc14 IC1.74
  Bottom 0.25: R44.A 36.88,10.88 36,11.75 34.25,11.75 31,15 v29.5,15 | v25,22 25,23.25 v24.85,23.4
LED0  (via drill 0.35)
  Top 0.25: IC1.1 19.4,25.2 arc-71 18.5,26.3 arc12 18,29.2 arc-61 18.8,32.3 21.4,34.9 arc52 22.8,39 arc65 v21.75,40.25
  Bottom 0.25: IC5.1 34.88,41.38 35.25,41.75 35.25,42.5 34.75,43 22,43 21.5,42.5 21.5,40.5 v21.75,40.25
LED1  (via drill 0.35)
  Top 0.25: IC1.4 19.1,23.75 arc-79 18.8,24.2 arc-16 18.9,24.6 arc88 18.7,25.1 arc-58 18.1,25.9 arc5 17.9,27 arc-1 17.4,29.3 arc-47 18,32.2 arc-17 19.8,34.1 arc31 22.2,37.4 arc53 22,39.3 arc51 21.2,39.8 arc-77 v21,40
  Bottom 0.25: IC5.3 36.78,40.72 35.75,41.75 35.75,42.75 35,43.5 21.75,43.5 21,42.75 v21,40
N$1  (via drill 0.35)
  Top 0.35: v21.25,7.75 22.5,6.9 22.95,6.9 LED2.A
  Bottom 0.35: R14.2 22.4,8.6 v21.25,7.75
N$2  (via drill 0.35)
  Top 0.35: LED3.A 28.25,6.5 v28.7,6.5
  Bottom 0.35: v28.7,6.5 28.3,6.9 R15.2
N$3
  Bottom 0.55: IC2.6 24.95,35.8 C32.2 26.15,37 30.25,37 | L6.1 35.6,35.25 32,35.25 30.25,37 | 30.25,37 D1.CATHODE
  pour Bottom (no thermals): 29.5,39.25 29.5,36 30.75,34.75 32.25,34.75 32.75,34.25 32.75,33 34.75,33 34.75,35.75 34.5,36 32.5,36 32,36.5 32,37.75 32,39.25
N$4
  Bottom 0.25: IC4.7 11.7,24.8 13,23.5 13,21.5 13.25,21.25 R1.2
  Bottom 0.406: IC4.6 IC4.7
N$5
  Bottom 0.25: IC4.8 7.75,20 R7.2
  Bottom 0.406: IC4.9 IC4.8
N$6  (via drill 0.4)
  Top 0.25: v2.3,11.2 3.1,12 12.5,12 v13.5,13
  Bottom 0.25: R9.2 14.15,12.85 13.65,12.85 v13.5,13 | v2.3,11.2 IC6.14
  Bottom 0.406: IC6.14 IC6.13
N$7
  Bottom 0.5: C32.1 26.85,34.65 IC2.1
N$8
  pour Bottom (no thermals): 25.5,33.75 25.5,32.25 22,32.25 22,35.5 23.5,35.5 23.5,34.25 24,33.75 24.5,33.75
N$9  (via drill 0.35, 0.4)
  Top 0.25: v13,17.6 12.5,18.1 11.6,18.1 11.1,17.6 10.3,17.6 9.8,18.1 3.4,18.1 v2.3,17
  Bottom 0.25: v2.3,17 3.1,17 3.1,16.85 IC6.1 | R12.2 14.15,17.55 14,17.7 13.9,17.6 v13,17.6
  Bottom 0.406: 3.1,16.85 3.7,16.85 IC6.2
N$10  (via drill 0.35)
  Top 0.25: IC1.21 v19.4,14.95
  Bottom 0.25: v19.4,14.95 L3.B
N$11  (via drill 0.35)
  Top 0.35: v26.3,9.9 25.84,9.9 C6.1 25.85,10.2 IC1.36
  Bottom 0.35: L2.B 26.26,9.94 v26.3,9.9
N$12  (via drill 0.35)
  Top 0.25: 27.51,26.73 C5.1 | 27.51,26.73 27.75,26.9 | IC1.70 27.65,26.55 27.51,26.73
  Top 0.5: v27.75,27.75 27.5,27.5 27.5,26.77 C5.1
  Bottom 0.5: L5.B 28.93,28.93 v27.75,27.75
N$13
  Bottom 0.25: IC4.1 IC4.2 3.7,25.6 4.5,26.4 11.3,26.4 13.65,23.8 13.9,23.55 R3.2
N$14  (via drill 0.35, 0.4)
  Top 0.25: v2.3,19.2 3.1,19.75 8.75,19.75 9,20 9.9,20 10.7,19.2 v10.7,18.2
  Bottom 0.25: v2.3,19.2 IC4.14 | v10.7,18.2 10.9,18 12.5,18 13.3,18.8 13.85,18.8 R5.2
  Bottom 0.406: IC4.14 IC4.13
N$15  (via drill 0.4)
  Top 0.25: v10.7,11 10.7,10.8 9.9,10 3.5,10 v2.3,9.2
  Bottom 0.25: v10.7,11 10.7,11.4 11.3,12 12.5,12 13.25,11.25 R13.2 | v2.3,9.2 IC7.1
  Bottom 0.406: IC7.1 IC7.2
N$16
  Bottom 0.25: R2.2 8.5,10 7.3,8.8 IC7.7
  Bottom 0.406: IC7.7 IC7.6
N$17  (via drill 0.4)
  Top 0.25: v13.3,14.5 13,14.5 12.5,14 11.3,14 10.7,13.4 v10.7,13
  Bottom 0.25: v10.7,13 10.7,12.6 10.1,12 8.1,12 7.3,11.2 IC6.8 | v13.3,14.5 14.05,13.75 R10.2
  Bottom 0.406: IC6.9 IC6.8
N$18
  Bottom 0.25: IC6.7 7.3,16.8 8.1,16 13.75,16 13.9,16.15 R11.2
  Bottom 0.406: IC6.6 IC6.7
N$19  (via drill 0.4)
  Top 0.25: v12.9,8 11.5,8 10.7,7.2 v10.7,5.2
  Bottom 0.25: v10.7,5.2 10.7,4.2 9.7,3.2 IC7.8 | v12.9,8 13.65,8.75 R4.2
  Bottom 0.406: IC7.8 IC7.9
N$20
  Bottom 0.5: L7.2 12.94,31.51 D4.1 14.25,28.5 17.25,25.5 17.25,24.5 18.5,23.25 19.5,23.25 20,22.75 20,22.25 20.5,21.75 | 20.5,21.75 20.75,21.5 | 20.5,21.75 20.68,21.75 IC9.6
N$21
  Bottom 0.5: D3.1 13.44,35.99 L7.1 14.75,32.2 14.75,29.25 18.25,25.75 18.25,24.75 18.73,24.27 IC9.7
N$22  (via drill 0.35)
  Top 0.25: v20,32.25 20.14,32.12 SW3.2A
  Bottom 0.25: R19.1 19.75,32.5 v20,32.25
N$23  (via drill 0.35)
  Top 0.25: v18.75,31 18.86,30.89 SW3.1A
  Bottom 0.25: v18.75,31 R17.1
N$24  (via drill 0.35)
  Top 0.25: SW3.2B SW3.1B v18,38.25
  Bottom 0.25: v18,38.25 C18.1
N$25  (via drill 0.4)
  Top 0.25: v14.1,4.2 13.4,3.5 12.5,3.5 12.2,3.2 v2.3,3.2
  Bottom 0.25: v2.3,3.2 IC7.14 | R6.2 14.65,4.75 v14.1,4.2
  Bottom 0.406: IC7.14 IC7.13
N$37  (via drill 0.35)
  Top 0.55: LED0.C 34.75,35.75 34.25,36.25 v34.25,36.75
  Bottom 0.55: v34.25,36.75 34.34,36.84 IC5.6
N$38  (via drill 0.35)
  Top 0.5: 37.5,35.75 36.75,36.5 v36.75,37.5
  Top 0.55: 37.5,35.75 LED1.C
  Bottom 0.55: IC5.4 36.75,36.81 v36.75,37.5
N$39  (via drill 0.35)
  Top 0.55: LED0.A 33.75,38.75 v33.75,39.5
  Bottom 0.55: v33.75,39.5 33.5,39.25 33.5,38.75 33.47,38.78 R36.2
N$40  (via drill 0.35)
  Top 0.4: LED1.A 38.25,37.25 v38,37
  Bottom 0.4: v38,37 38.15,37.6 R37.2
PWROUT_INT  (via drill 0.35)
  Top 0.25: v21.8,16.1 21.8,17.4 19.8,19.4 IC1.12
  Bottom 0.25: R47.1 R46.2 v21.8,16.1
SERIAL_RX/I2C_SDA
  Top 0.25: IC1.40 28.4,10.3 arc47 28.9,9.7 arc-82 30.2,6.5 arc-39 29.8,6 arc59 29.2,4.9 arc3 29.3,2.8 arc-32 X1.6
SERIAL_TX/I2C_SCL
  Top 0.25: IC1.34 24.95,10.6 arc14 24.25,4.9 arc35 24.75,3.3 arc-22 X1.3
SHIELD  (via drill 0.4)  (1 unrouted)
  Top 0.5: v16,6 15.3,6 14.5,5.2 13.8,5.2 13.3,4.7 13.1,4.7 12.6,4.2
  other vias: 2,38.5 2,35.5 2,32.5 2,29.5 4,6 19.4,28.8
  pour Top (rank 5): 0,44 41,44 41,0 0,0
  pour Bottom (rank 5): 0,0 41,0 41,44 0,44
SPI_CLK
  Top 0.25: IC1.77 24.1,26.8 arc-1 26,33.25 arc10 X2.5
SPI_CS
  Top 0.25: IC1.75 25.05,26.55 arc-11 28.25,35.25 arc16 X2.7
SPI_SIMO
  Top 0.25: IC1.80 22.6,27.15 arc15 X2.2
SPI_SOMI
  Top 0.25: IC1.76 24.75,27.25 arc-3 26.65,33.25 arc7 X2.6
TCK
  Top 0.25: IC1.57 33.2,19.95 arc-88 33.5,19.45 arc2 32.75,16 arc23 32.75,12 arc104 33.75,11.5 arc-64 X6.9 X6.11
TDI
  Top 0.25: IC1.59 33.55,20.9 arc-72 34.3,20 arc-20 34.1,18.05 arc13 33.75,15.9 arc84 34.2,15.35 arc-8 X6.3
TDO  (via drill 0.35)
  Top 0.25: IC1.58 33.4,20.4 arc-69 33.9,19.8 arc-11 33.9,19.3 arc-14 33.75,18.45 arc14 33.65,18 arc-6 33.45,16.95 arc14 33.15,13.3 arc92 34,12.75 arc-42 X6.7 36,12.2 36.3,11.6 35.4,8 v36,6.9
  Bottom 0.25: v36,6.9 36.5,6.9 36.9,7.7 R43.A
TMS
  Top 0.25: IC1.60 33.7,21.4 arc-68 35,20 arc-1 X6.1
VDD  (via drill 0.35)  (2 unrouted)
  Top 0.25: IC1.7 18.4,22.35 18.3,22.4 18.5,23.6 18.25,23.85 C3.1 | IC1.72 26.45,26 26.4,26.5 C4.1 | v30.75,20.25 30.75,19.5 31.35,18.9 IC1.54
  Bottom 0.25: C2.1 32.1,17.88 32.1,19.9 31.8,20.25 v30.75,20.25
VDDA  (via drill 0.35)
  Bottom 0.25: L4.B v17.5,15.25
  other vias: 16.75,15.25
  pour Top (rank 2, no thermals): 17,16 16.5,15.5 15.75,15.5 15.75,14.5 18.75,14.5 18.75,15.5
VSENSE1
  Bottom 0.5: 27.05,30.9 27.05,29.7 R16.1 | 27.05,30.9 IC2.3 | R18.2 26.95,31 27.05,30.9

## Text on the board
tPlace: CAN | 0 | 1 | +12V | +5V | +3V3 | GND | JTAG | SENSORS
bPlace: Magic CAN Node | v2.0 | BOOT0 | 1 | BOOT1
Document: Magic CAN Node | r02 - 2014-02-10 | Aaron Bonnell-Kangas
Reference: Magic CAN Node | v2 DRAFT | Aaron Bonnell-Kangas
bDocu: +3V3 | +5V | +12V | GND | SHIELD